# EAGLE board CT_schematic (EAGLE 7.6.0)

Size 100 x 80 mm. Coordinates in mm from the lower left corner, seen from the top.
Outline: 0,0 100,0 100,80 0,80 0,0
Copper layers (1*16): Top 0.035mm / dielectric 1.5mm / Bottom 0.035mm
Design rules "default": minimum track width 10mil, minimum drill 24mil, track to track 8mil, track to pad 8mil, pad to pad 8mil, via to via 8mil, smd to smd 8mil, copper to edge 40mil, drill to drill 8mil, minimum pad ring 10mil, minimum via ring 8mil, stop-mask expansion 4mil, vias tented up to drill 0mil, thermal gap 10mil

## Footprints (pad centres in the part's own frame; a part is rotated, then mirrored left to right if it is on the bottom)
C0603 = smd 0.8 x 0.8: 1 -0.762,0; 2 0.762,0
C0402 = smd 0.5 x 0.5: 1 -0.508,0; 2 0.508,0
C1206 = smd 1.3 x 1.6: 1 -1.524,0; 2 1.524,0
C0805 = smd 1.2 x 1.3: 1 -1.016,0; 2 1.016,0
EXV-9H = smd 3.505 x 1.676: 1 -2.857,0; 2 2.857,0
DR1040 = smd 1.6 x 3.2: 1 -4.458,0; 2 4.458,0
PJ-037B_PACKAGE = drill 3.7 square: 1 12,0 | drill 3.2 square: 2 6,0
R0603 = smd 0.8 x 0.8: 1 -0.762,0; 2 0.762,0
UFQFPN48 = smd 0.559 x 0.305: 1 -3.375,2.751; 2 -3.375,2.251; 3 -3.375,1.75; 4 -3.375,1.25; 5 -3.375,0.75; 6 -3.375,0.25; 7 -3.375,-0.25; 8 -3.375,-0.75; 9 -3.375,-1.25; 10 -3.375,-1.75; 11 -3.375,-2.251; 12 -3.375,-2.751; 25 3.375,-2.751; 26 3.375,-2.251; 27 3.375,-1.75; 28 3.375,-1.25; 29 3.375,-0.75; 30 3.375,-0.25; 31 3.375,0.25; 32 3.375,0.75; 33 3.375,1.25; 34 3.375,1.75; 35 3.375,2.251; 36 3.375,2.751 | smd 0.305 x 0.559: 13 -2.751,-3.375; 14 -2.251,-3.375; 15 -1.75,-3.375; 16 -1.25,-3.375; 17 -0.75,-3.375; 18 -0.25,-3.375; 19 0.25,-3.375; 20 0.75,-3.375; 21 1.25,-3.375; 22 1.75,-3.375; 23 2.251,-3.375; 24 2.751,-3.375; 37 2.751,3.375; 38 2.251,3.375; 39 1.75,3.375; 40 1.25,3.375; 41 0.75,3.375; 42 0.25,3.375; 43 -0.25,3.375; 44 -0.75,3.375; 45 -1.25,3.375; 46 -1.75,3.375; 47 -2.251,3.375; 48 -2.751,3.375 | smd 5.588 x 5.588: 49 0,0
SAMTEC_FTSH-105-01-L-DV-K = smd 0.762 x 2.794: 1 -2.54,-2.032; 2 -2.54,2.032; 3 -1.27,-2.032; 4 -1.27,2.032; 5 0,-2.032; 6 0,2.032; 7 1.27,-2.032; 8 1.27,2.032; 9 2.54,-2.032; 10 2.54,2.032
TDFN-8/6MM = smd 0.3 x 0.75: 1 0,0; 2 0.5,0; 3 1,0; 4 1.5,0; 5 1.5,3; 6 1,3; 7 0.5,3; 8 0,3
QFN-32 = smd 0.6 x 0.3: 1 -2.3,1.75; 2 -2.3,1.25; 3 -2.3,0.75; 4 -2.3,0.25; 5 -2.3,-0.25; 6 -2.3,-0.75; 7 -2.3,-1.25; 8 -2.3,-1.75; 17 2.3,-1.75; 18 2.3,-1.25; 19 2.3,-0.75; 20 2.3,-0.25; 21 2.3,0.25; 22 2.3,0.75; 23 2.3,1.25; 24 2.3,1.75 | smd 0.3 x 0.6: 9 -1.75,-2.3; 10 -1.25,-2.3; 11 -0.75,-2.3; 12 -0.25,-2.3; 13 0.25,-2.3; 14 0.75,-2.3; 15 1.25,-2.3; 16 1.75,-2.3; 25 1.75,2.3; 26 1.25,2.3; 27 0.75,2.3; 28 0.25,2.3; 29 -0.25,2.3; 30 -0.75,2.3; 31 -1.25,2.3; 32 -1.75,2.3 | smd 3.2 x 3.2: EXP 0,0
SJ-43515TS-SMT-TR = smd 2.2 x 3: 1 0.6,-7.4; 4 3.4,-7.4 | smd 3 x 3: 2 12.8,-7.4; 5 17,-3 | smd 2 x 3: 3 5.3,0; 6 2.5,0 | drill 1.8: P$7 4.5,-3.69; P$8 11.54,-3.69
WM-64PC = drill 0.6 pad 1: 1 -1,0.95; 2 -1,-0.95
WFDN-8 = smd 0.48 x 0.7: 1 0,0; 2 1.27,0; 3 2.54,0; 4 3.81,0; 5 3.81,4.45; 6 2.54,4.45; 7 1.27,4.45; 8 0,4.45 | smd 4 x 3: 9 1.89,2.25
USB-A-H = drill 0.914: 1 2.718,3.493; 2 2.718,1.003; 3 2.718,-1.003; 4 2.718,-3.493 | drill 2.311: 5 0,-6.566; 6 0,6.566
SOT143B = smd 1 x 0.7: 1 -0.75,-1 | smd 0.6 x 0.7: 2 0.95,-1; 3 0.95,1; 4 -0.95,1
ASEK = smd 1.4 x 1: 1 -1.1,-0.8; 2 1.1,-0.8; 3 1.1,0.8; 4 -1.1,0.8
ASFL1 = smd 1.7 x 1.5: 1 -1.27,-1.1; 2 1.27,-1.1; 3 1.27,1.1; 4 -1.27,1.1
WSON-8 = smd 0.3 x 0.6: 1 -0.75,0; 2 0.05,0; 3 0.85,0; 4 1.65,0; 5 1.65,3.8; 6 0.85,3.8; 7 0.05,3.8; 8 -0.75,3.8 | smd 3 x 2.6: PAD 0.45,1.9
TSOT-23-5 = smd 1.3 x 0.62: 1 -1.31,0.95; 2 -1.31,0; 3 -1.31,-0.95; 4 1.31,-0.95; 5 1.31,0.95
SON-6 = smd 0.55 x 0.3: 1 -0.355,0.5 | smd 0.52 x 0.3: 2 -0.37,0; 3 -0.37,-0.5; 4 0.37,-0.5; 5 0.37,0; 6 0.37,0.5
SW_4-1437565-2 = smd 1.4 x 2.1: 1 -2.23,4.55; 2 -2.23,-4.55; 3 2.23,4.55; 4 2.23,-4.55
LGM67K-G1J2-24-Z = smd 0.8 x 1.4: A -2,0; C 0,0
NC7SZ125M5X = smd 1.3 x 0.7: 1 -1.3,0.95; 2 -1.3,0; 3 -1.3,-0.95; 4 1.3,-0.95; 5 1.3,0.95

## Placement (x,y rotation side)
C1  1e-06  [C0603]  -33.02,80.01 0 top  (outside the outline)
C2  1e-07  [C0603]  -36.83,80.01 0 top  (outside the outline)
C3  1e-07  [C0603]  -40.64,80.01 0 top  (outside the outline)
C4  1e-07  [C0603]  -44.45,80.01 0 top  (outside the outline)
C5  1e-07  [C0603]  -48.26,80.01 0 top  (outside the outline)
C6  1e-07  [C0603]  -52.07,80.01 0 top  (outside the outline)
C7  4.7e-06  [C0603]  -29.21,80.01 0 top  (outside the outline)
C8  1e-08  [C0603]  -55.88,80.01 0 top  (outside the outline)
C9  1e-06  [C0603]  -59.69,80.01 0 top  (outside the outline)
C10  1e-07  [C0603]  -63.5,80.01 0 top  (outside the outline)
C11  1e-07  [C0402]  -68.58,85.09 0 top  (outside the outline)
C12  1e-08  [C0402]  -72.39,85.09 0 top  (outside the outline)
C13  1e-06  [C0603]  -67.31,80.01 0 top  (outside the outline)
C14  1e-06  [C0603]  -71.12,80.01 0 top  (outside the outline)
C15  1e-06  [C0603]  -74.93,80.01 0 top  (outside the outline)
C16  1e-06  [C0603]  -78.74,80.01 0 top  (outside the outline)
C17  1e-06  [C0603]  -82.55,80.01 0 top  (outside the outline)
C18  1e-06  [C0603]  -15.24,85.09 0 top  (outside the outline)
C19  1e-06  [C0603]  -19.05,85.09 0 top  (outside the outline)
C20  1e-07  [C0402]  -76.2,85.09 0 top  (outside the outline)
C21  1e-07  [C0402]  -80.01,85.09 0 top  (outside the outline)
C22  1e-07  [C0402]  -83.82,85.09 0 top  (outside the outline)
C23  1e-07  [C0402]  -15.24,90.17 0 top  (outside the outline)
C24  1e-06  [C0603]  -22.86,85.09 0 top  (outside the outline)
C25  1e-07  [C0402]  -19.05,90.17 0 top  (outside the outline)
C26  1e-08  [C0402]  -22.86,90.17 0 top  (outside the outline)
C27  1e-08  [C0402]  -26.67,90.17 0 top  (outside the outline)
C28  1e-08  [C0402]  -30.48,90.17 0 top  (outside the outline)
C29  1e-08  [C0402]  -34.29,90.17 0 top  (outside the outline)
C30  1e-05  [C1206]  -39.37,67.31 0 top  (outside the outline)
C31  1e-05  [C0805]  -57.15,67.31 0 top  (outside the outline)
C32  1e-05  [C0805]  -62.23,67.31 0 top  (outside the outline)
C33  1e-05  [C0805]  -67.31,67.31 0 top  (outside the outline)
C34  1e-07  [C0402]  -38.1,90.17 0 top  (outside the outline)
C35  0.0001  [EXV-9H]  -73.66,58.42 0 top  (outside the outline)
C36  0.0001  [EXV-9H]  -17.78,68.58 0 top  (outside the outline)
C37  1e-08  [C0402]  -41.91,90.17 0 top  (outside the outline)
C38  1e-08  [C0402]  -45.72,90.17 0 top  (outside the outline)
I1  5.2e-06  [DR1040]  -38.1,36.83 0 top  (outside the outline)
J1  PJ-037B  [PJ-037B_PACKAGE]  -83.82,24.13 0 top  (outside the outline)
R1  10000.0  [R0603]  -45.72,74.93 0 top  (outside the outline)
R2  1000.0  [R0603]  -26.67,85.09 0 top  (outside the outline)
R3  1600.5  [R0603]  -30.48,85.09 0 top  (outside the outline)
R4  4700.0  [R0603]  -34.29,85.09 0 top  (outside the outline)
R5  2200.0  [R0603]  -38.1,85.09 0 top  (outside the outline)
R6  2200.0  [R0603]  -41.91,85.09 0 top  (outside the outline)
R7  10000.0  [R0603]  -50.8,74.93 0 top  (outside the outline)
R8  10000.0  [R0603]  -55.88,74.93 0 top  (outside the outline)
R9  10000.0  [R0603]  -60.96,74.93 0 top  (outside the outline)
R10  10000.0  [R0603]  -66.04,74.93 0 top  (outside the outline)
R11  10000.0  [R0603]  -71.12,74.93 0 top  (outside the outline)
R12  5.0  [R0603]  -45.72,85.09 0 top  (outside the outline)
R13  10000.0  [R0603]  -76.2,74.93 0 top  (outside the outline)
R14  10000.0  [R0603]  -81.28,74.93 0 top  (outside the outline)
R15  10000.0  [R0603]  -15.24,80.01 0 top  (outside the outline)
R16  1270.0  [R0603]  -49.53,85.09 0 top  (outside the outline)
R17  1270.0  [R0603]  -53.34,85.09 0 top  (outside the outline)
R18  100000.0  [R0603]  -85.09,66.04 0 top  (outside the outline)
R19  100000.0  [R0603]  -15.24,74.93 0 top  (outside the outline)
R20  100000.0  [R0603]  -20.32,74.93 0 top  (outside the outline)
R21  100000.0  [R0603]  -25.4,74.93 0 top  (outside the outline)
R22  200.0  [R0603]  -57.15,85.09 0 top  (outside the outline)
R23  1000.0  [R0603]  -60.96,85.09 0 top  (outside the outline)
R24  220000.0  [R0603]  -30.48,74.93 0 top  (outside the outline)
R25  1000000.0  [R0603]  -80.01,66.04 0 top  (outside the outline)
R26  10000.0  [R0603]  -20.32,80.01 0 top  (outside the outline)
R27  10000.0  [R0603]  -25.4,80.01 0 top  (outside the outline)
R28  9100.0  [R0603]  -64.77,85.09 0 top  (outside the outline)
R29  680000.0  [R0603]  -35.56,74.93 0 top  (outside the outline)
R30  120000.0  [R0603]  -40.64,74.93 0 top  (outside the outline)
U1  STM32L443CCU6  [UFQFPN48]  -67.31,48.26 0 top  (outside the outline)
U2  FTSH-105-01-L-DV-K  [SAMTEC_FTSH-105-01-L-DV-K]  -52.07,7.62 0 top  (outside the outline)
U3  24AA128T-I/MNY  [TDFN-8/6MM]  -39.37,48.26 0 top  (outside the outline)
U4  SGTL5000XNAA3  [QFN-32]  -22.86,49.53 0 top  (outside the outline)
U5  SJ-43515TS-SMT-TR  [SJ-43515TS-SMT-TR]  -85.09,10.16 0 top  (outside the outline)
U6  SJ-43515TS-SMT-TR  [SJ-43515TS-SMT-TR]  -39.37,26.67 0 top  (outside the outline)
U7  SJ-43515TS-SMT-TR  [SJ-43515TS-SMT-TR]  -67.31,26.67 0 top  (outside the outline)
U8  WM-64PCT  [WM-64PC]  -71.12,36.83 0 top  (outside the outline)
U9  SST26VF064B-104I/MF  [WFDN-8]  -62.23,34.29 0 top  (outside the outline)
U10  61400416021  [USB-A-H]  -19.05,8.89 0 top  (outside the outline)
U11  prtr5v0u2ax  [SOT143B]  -58.42,90.17 0 top  (outside the outline)
U12  ASEK-32.768KHz-ECST  [ASEK]  -64.77,58.42 0 top  (outside the outline)
U13  ASFL-24.57MHZ-NCS  [ASFL1]  -27.94,59.69 0 top  (outside the outline)
U14  ASFL1-25MHZ-NCS  [ASFL1]  -44.45,59.69 0 top  (outside the outline)
U15  LP3878SDX-ADJ/NOPB  [WSON-8]  -59.69,46.99 0 top  (outside the outline)
U16  ltc3406es5  [TSOT-23-5]  -72.39,66.04 0 top  (outside the outline)
U17  TPS3895ADRYR  [SON-6]  -62.23,88.9 0 top  (outside the outline)
U18  4-1437565-2  [SW_4-1437565-2]  -27.94,38.1 0 top  (outside the outline)
U19  Q65110A2395  [LGM67K-G1J2-24-Z]  -27.94,67.31 0 top  (outside the outline)
U20  nc7sz125m5x  [NC7SZ125M5X]  -44.45,66.04 0 top  (outside the outline)
U21  nc7sz125m5x  [NC7SZ125M5X]  -50.8,66.04 0 top  (outside the outline)

## Library data of the parts
C1-C38 I1 J1 R1-R30 U1-U21 = circuit_tree

## Nets
CLK_U1_3: U1.3 U12.3
CLK_U1_5: U1.5 U14.3
CLK_U4_21: U4.21 U13.3
GND: C1.2 C2.2 C3.2 C4.2 C5.2 C6.2 C7.2 C8.2 C9.2 C10.2 C11.2 C12.2 C20.2 C21.2 C22.2 C23.2 C24.2 C25.2 C26.2 C27.2 C28.2 C29.2 C30.2 C31.2 C32.2 C33.1 C33.2 C34.2 C35.2 C36.2 C37.2 C38.2 J1.2 R2.2 R7.2 R11.2 R12.2 R14.2 R17.2 R23.2 R24.2 R28.2 R30.2 U1.8 U1.23 U1.35 U1.47 U1.49 U2.3 U2.5 U3.4 U3.7 U4.1 U4.3 U4.7 U4.EXP U6.1 U7.1 U8.2 U9.4 U9.9 U10.4 U10.5 U10.6 U11.1 U12.2 U13.2 U14.2 U15.3 U15.PAD U16.2 U17.2 U19.C U20.2 U20.3 U21.1 U21.3
NET_U1_7: R4.1 U1.7 U21.4
NET_U1_30: R5.1 U1.30 U3.6
NET_U1_31: R6.1 U1.31 U3.5
NET_U1_44: R7.1 U1.44
NET_U1_45: R3.1 U1.45 U19.A
NET_U1_46: R1.1 U1.46 U18.3 U18.4
NET_U2_9: R12.1 U2.9
NET_U3_1: R13.1 U3.1
NET_U3_2: R14.1 U3.2
NET_U3_3: R15.1 U3.3
NET_U4_10: C23.1 U4.10
NET_U4_29: R16.1 U4.29
NET_U4_31: R17.1 U4.31
NET_U5_1: U4.4 U5.1
NET_U5_2: U4.2 U5.2
NET_U5_5: U4.6 U5.5
NET_U6_2: C14.1 U6.2
NET_U6_5: C13.1 U6.5
NET_U6_11: C14.2
NET_U6_12: C13.2
NET_U7_2: C16.1 C17.1 U7.2
NET_U7_5: C15.1 U7.5
NET_U7_13: C16.2 C17.2
NET_U7_14: C15.2
NET_U8_1: C18.1 C19.1 C24.1 U4.16 U8.1
NET_U8_15: C18.2 C19.2
NET_U11_4: U10.1 U11.4
NET_U15_1: C29.1 U15.1
NET_U15_6: R22.2 R23.1 U15.6
NET_U15_8: R21.1 U15.8
NET_U16_1: U16.1
NET_U16_3: I1.1 U16.3
NET_U16_5: R24.1 R25.1 U16.5
NET_U16_ATNET_3: I1.2 R25.2
NET_U17_1: R27.1 R28.1 U17.1
NET_U17_3: R29.2 R30.1 U17.3
NET_U17_4: R26.1 U17.4 U20.4 U21.2
NET_U18_1: R2.1 U18.1 U18.2
PROC_QUADSPI_BK1_IO0: U1.19 U9.5
PROC_QUADSPI_BK1_IO1: U1.18 U9.2
PROC_QUADSPI_BK1_IO2: R19.1 U1.17 U9.3
PROC_QUADSPI_BK1_IO3: R20.1 U1.16 U9.7
PROC_QUADSPI_BK1_NCS: R18.1 U1.12 U9.1
PROC_QUADSPI_CLK: U1.13 U9.6
PROC_SAI1_FS_A: U1.25 U4.23
PROC_SAI1_SCK_A: U1.21 U4.24
PROC_SAI1_SD_A: U1.28 U4.26
PROC_SYS_JTCK_SWCLK: R11.1 U1.37 U2.4
PROC_SYS_JTDI: R9.1 U1.38 U2.8
PROC_SYS_JTDO_SWO: U1.39 U2.6
PROC_SYS_JTMS_SWDIO: R10.1 U1.34 U2.2
PROC_USB_DM: U1.32 U10.2 U11.3
PROC_USB_DP: U1.33 U10.3 U11.2
RST_OUT_U2_JTAG_RST_B: R8.1 U2.10 U20.1
VCC_S1_4V8: C30.1 C32.1 C35.1 C36.1 J1.1 R21.2 U15.4 U16.4
VCC_TIER1_1V2: C20.1 C31.1 R22.1 U4.30 U15.5
VCC_TIER1_3V3: C1.1 C2.1 C3.1 C4.1 C5.1 C6.1 C7.1 C8.1 C9.1 C10.1 C11.1 C12.1 C21.1 C22.1 C25.1 C26.1 C27.1 C28.1 C33.2 C34.1 C37.1 C38.1 I1.2 R1.2 R3.2 R4.2 R5.2 R6.2 R8.2 R9.2 R10.2 R13.2 R15.2 R16.2 R18.2 R19.2 R20.2 R25.2 R26.2 R27.2 R29.1 U1.1 U1.9 U1.24 U1.36 U1.48 U2.1 U3.8 U4.5 U4.20 U9.8 U12.4 U13.4 U14.4 U17.6 U20.5 U21.5

## Tracks (layer width: path | path; a pad name or v marks a point on that pad's centre or on a via)
CLK_U1_3  (1 unrouted)
CLK_U1_5  (1 unrouted)
CLK_U4_21  (1 unrouted)
GND  (76 unrouted)
NET_U1_7  (2 unrouted)
NET_U1_30  (2 unrouted)
NET_U1_31  (2 unrouted)
NET_U1_44  (1 unrouted)
NET_U1_45  (2 unrouted)
NET_U1_46  (3 unrouted)
NET_U2_9  (1 unrouted)
NET_U3_1  (1 unrouted)
NET_U3_2  (1 unrouted)
NET_U3_3  (1 unrouted)
NET_U4_10  (1 unrouted)
NET_U4_29  (1 unrouted)
NET_U4_31  (1 unrouted)
NET_U5_1  (1 unrouted)
NET_U5_2  (1 unrouted)
NET_U5_5  (1 unrouted)
NET_U6_2  (1 unrouted)
NET_U6_5  (1 unrouted)
NET_U7_2  (2 unrouted)
NET_U7_5  (1 unrouted)
NET_U7_13  (1 unrouted)
NET_U8_1  (4 unrouted)
NET_U8_15  (1 unrouted)
NET_U11_4  (1 unrouted)
NET_U15_1  (1 unrouted)
NET_U15_6  (2 unrouted)
NET_U15_8  (1 unrouted)
NET_U16_3  (1 unrouted)
NET_U16_5  (2 unrouted)
NET_U16_ATNET_3  (1 unrouted)
NET_U17_1  (2 unrouted)
NET_U17_3  (2 unrouted)
NET_U17_4  (3 unrouted)
NET_U18_1  (2 unrouted)
PROC_QUADSPI_BK1_IO0  (1 unrouted)
PROC_QUADSPI_BK1_IO1  (1 unrouted)
PROC_QUADSPI_BK1_IO2  (2 unrouted)
PROC_QUADSPI_BK1_IO3  (2 unrouted)
PROC_QUADSPI_BK1_NCS  (2 unrouted)
PROC_QUADSPI_CLK  (1 unrouted)
PROC_SAI1_FS_A  (1 unrouted)
PROC_SAI1_SCK_A  (1 unrouted)
PROC_SAI1_SD_A  (1 unrouted)
PROC_SYS_JTCK_SWCLK  (2 unrouted)
PROC_SYS_JTDI  (2 unrouted)
PROC_SYS_JTDO_SWO  (1 unrouted)
PROC_SYS_JTMS_SWDIO  (2 unrouted)
PROC_USB_DM  (2 unrouted)
PROC_USB_DP  (2 unrouted)
RST_OUT_U2_JTAG_RST_B  (2 unrouted)
VCC_S1_4V8  (7 unrouted)
VCC_TIER1_1V2  (4 unrouted)
VCC_TIER1_3V3  (56 unrouted)